# Altium PCB CareLite 1.21.pcbdoc (part 2 of 3)
Units mil, origin at the board's own origin, x right, y up, seen from the top; angles counter-clockwise.
Board outline 3463.4 x 4229.5 mil, 2 copper layers (Top Layer, Bottom Layer); 41 components, 60 nets, 161 pads, 146 vias.
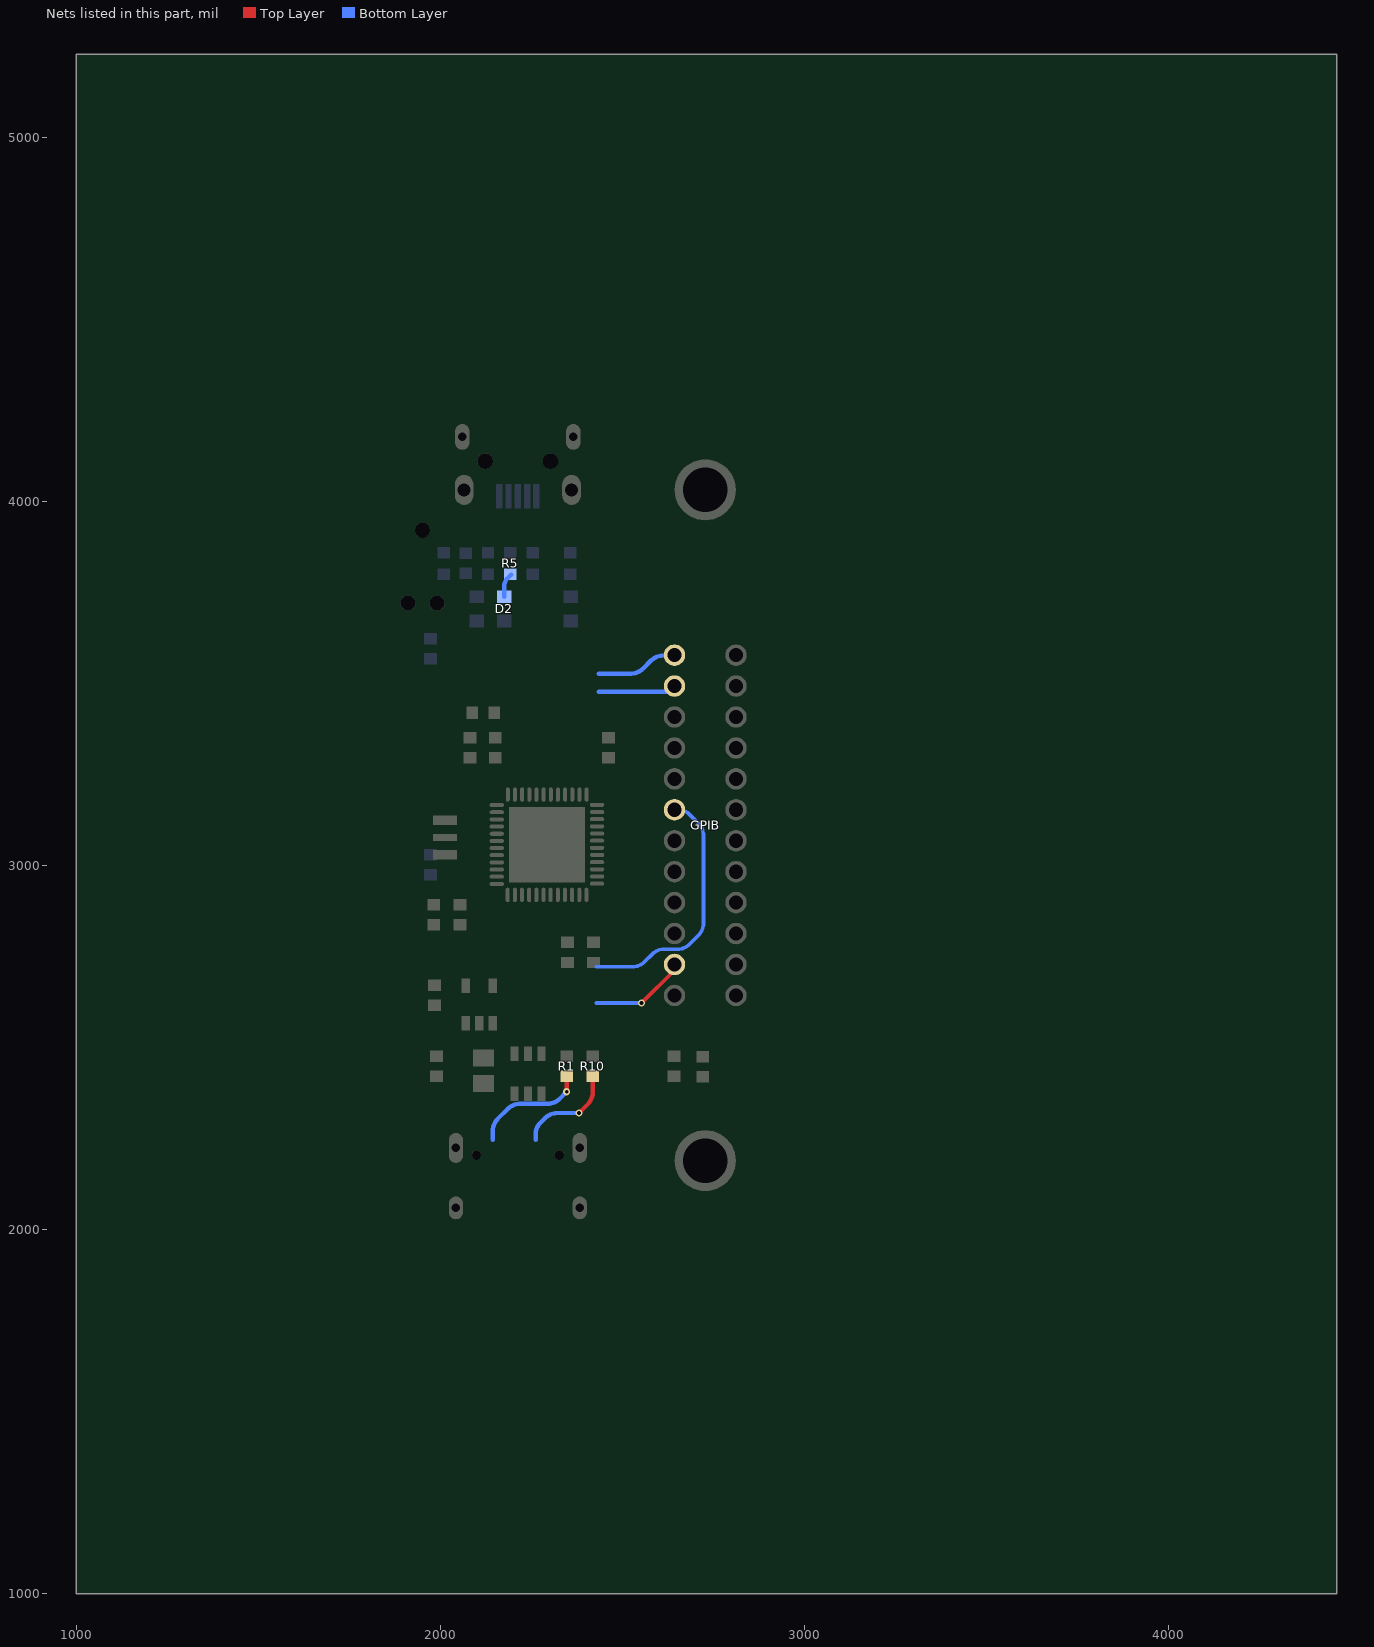
[diagram p2: the nets of this part, all layers, seen from the top]

## Footprints (in the part's own frame and the unit in brackets; to place one, negate y for a bottom-side part, rotate by r counter-clockwise, add the part's x,y. Pads: shape width x height; smd on the part's side, far side on the other; paste and mask are expansions set on the pad) (continued)
SOIC127P1030-24AM [mil]
  Top Layer region: 143.7,-288.78 142.72,-288.74 141.74,-288.64 140.77,-288.46 139.82,-288.22 138.89,-287.91 137.98,-287.53 137.1,-287.09 136.25,-286.59 135.44,-286.03 134.68,-285.41 133.96,-284.74 133.29,-284.02 132.67,-283.26 132.11,-282.45 131.61,-281.6 131.17,-280.72 130.79,-279.82 130.48,-278.88 130.24,-277.93 130.06,-276.96 129.96,-275.98 129.92,-275 129.96,-274.02 130.06,-273.04 130.24,-272.07 130.48,-271.12 130.79,-270.18 131.17,-269.28 131.61,-268.4 132.11,-267.55 132.67,-266.74 133.29,-265.98 133.96,-265.26 134.68,-264.59 135.44,-263.97 136.25,-263.41 137.1,-262.91 137.98,-262.47 138.89,-262.09 139.82,-261.78 140.77,-261.53 141.74,-261.36 142.72,-261.26 143.7,-261.22 218.5,-261.22 219.49,-261.26 220.47,-261.36 221.43,-261.53 222.39,-261.78 223.32,-262.09 224.23,-262.47 225.11,-262.91 225.95,-263.41 226.76,-263.97 227.53,-264.59 228.25,-265.26 228.92,-265.98 229.53,-266.74 230.1,-267.55 230.6,-268.4 231.04,-269.28 231.41,-270.18 231.72,-271.12 231.97,-272.07 232.14,-273.04 232.25,-274.02 232.28,-275 232.25,-275.98 232.14,-276.96 231.97,-277.93 231.72,-278.88 231.41,-279.82 231.04,-280.72 230.6,-281.6 230.1,-282.45 229.53,-283.26 228.92,-284.02 228.25,-284.74 227.53,-285.41 226.76,-286.03 225.95,-286.59 225.11,-287.09 224.23,-287.53 223.32,-287.91 222.39,-288.22 221.43,-288.46 220.47,-288.64 219.49,-288.74 218.5,-288.78
  Top Layer region: 143.7,-238.78 142.72,-238.74 141.74,-238.64 140.77,-238.46 139.82,-238.22 138.89,-237.91 137.98,-237.53 137.1,-237.09 136.25,-236.59 135.44,-236.03 134.68,-235.41 133.96,-234.74 133.29,-234.02 132.67,-233.26 132.11,-232.45 131.61,-231.6 131.17,-230.72 130.79,-229.82 130.48,-228.88 130.24,-227.93 130.06,-226.96 129.96,-225.98 129.92,-225 129.96,-224.02 130.06,-223.04 130.24,-222.07 130.48,-221.12 130.79,-220.18 131.17,-219.28 131.61,-218.4 132.11,-217.55 132.67,-216.74 133.29,-215.98 133.96,-215.26 134.68,-214.59 135.44,-213.97 136.25,-213.41 137.1,-212.91 137.98,-212.47 138.89,-212.09 139.82,-211.78 140.77,-211.53 141.74,-211.36 142.72,-211.26 143.7,-211.22 218.5,-211.22 219.49,-211.26 220.47,-211.36 221.43,-211.53 222.39,-211.78 223.32,-212.09 224.23,-212.47 225.11,-212.91 225.95,-213.41 226.76,-213.97 227.53,-214.59 228.25,-215.26 228.92,-215.98 229.53,-216.74 230.1,-217.55 230.6,-218.4 231.04,-219.28 231.41,-220.18 231.72,-221.12 231.97,-222.07 232.14,-223.04 232.25,-224.02 232.28,-225 232.25,-225.98 232.14,-226.96 231.97,-227.93 231.72,-228.88 231.41,-229.82 231.04,-230.72 230.6,-231.6 230.1,-232.45 229.53,-233.26 228.92,-234.02 228.25,-234.74 227.53,-235.41 226.76,-236.03 225.95,-236.59 225.11,-237.09 224.23,-237.53 223.32,-237.91 222.39,-238.22 221.43,-238.46 220.47,-238.64 219.49,-238.74 218.5,-238.78
  Top Layer region: 143.7,-188.78 142.72,-188.74 141.74,-188.64 140.77,-188.46 139.82,-188.22 138.89,-187.91 137.98,-187.53 137.1,-187.09 136.25,-186.59 135.44,-186.03 134.68,-185.41 133.96,-184.74 133.29,-184.02 132.67,-183.26 132.11,-182.45 131.61,-181.6 131.17,-180.72 130.79,-179.82 130.48,-178.88 130.24,-177.93 130.06,-176.96 129.96,-175.98 129.92,-175 129.96,-174.02 130.06,-173.04 130.24,-172.07 130.48,-171.12 130.79,-170.18 131.17,-169.28 131.61,-168.4 132.11,-167.55 132.67,-166.74 133.29,-165.98 133.96,-165.26 134.68,-164.59 135.44,-163.97 136.25,-163.41 137.1,-162.91 137.98,-162.47 138.89,-162.09 139.82,-161.78 140.77,-161.53 141.74,-161.36 142.72,-161.26 143.7,-161.22 218.5,-161.22 219.49,-161.26 220.47,-161.36 221.43,-161.53 222.39,-161.78 223.32,-162.09 224.23,-162.47 225.11,-162.91 225.95,-163.41 226.76,-163.97 227.53,-164.59 228.25,-165.26 228.92,-165.98 229.53,-166.74 230.1,-167.55 230.6,-168.4 231.04,-169.28 231.41,-170.18 231.72,-171.12 231.97,-172.07 232.14,-173.04 232.25,-174.02 232.28,-175 232.25,-175.98 232.14,-176.96 231.97,-177.93 231.72,-178.88 231.41,-179.82 231.04,-180.72 230.6,-181.6 230.1,-182.45 229.53,-183.26 228.92,-184.02 228.25,-184.74 227.53,-185.41 226.76,-186.03 225.95,-186.59 225.11,-187.09 224.23,-187.53 223.32,-187.91 222.39,-188.22 221.43,-188.46 220.47,-188.64 219.49,-188.74 218.5,-188.78
  Top Layer region: 143.7,-138.78 142.72,-138.74 141.74,-138.64 140.77,-138.46 139.82,-138.22 138.89,-137.91 137.98,-137.53 137.1,-137.09 136.25,-136.59 135.44,-136.03 134.68,-135.41 133.96,-134.74 133.29,-134.02 132.67,-133.26 132.11,-132.45 131.61,-131.6 131.17,-130.72 130.79,-129.82 130.48,-128.88 130.24,-127.93 130.06,-126.96 129.96,-125.98 129.92,-125 129.96,-124.02 130.06,-123.04 130.24,-122.07 130.48,-121.12 130.79,-120.18 131.17,-119.28 131.61,-118.4 132.11,-117.55 132.67,-116.74 133.29,-115.98 133.96,-115.26 134.68,-114.59 135.44,-113.97 136.25,-113.41 137.1,-112.91 137.98,-112.47 138.89,-112.09 139.82,-111.78 140.77,-111.53 141.74,-111.36 142.72,-111.26 143.7,-111.22 218.5,-111.22 219.49,-111.26 220.47,-111.36 221.43,-111.53 222.39,-111.78 223.32,-112.09 224.23,-112.47 225.11,-112.91 225.95,-113.41 226.76,-113.97 227.53,-114.59 228.25,-115.26 228.92,-115.98 229.53,-116.74 230.1,-117.55 230.6,-118.4 231.04,-119.28 231.41,-120.18 231.72,-121.12 231.97,-122.07 232.14,-123.04 232.25,-124.02 232.28,-125 232.25,-125.98 232.14,-126.96 231.97,-127.93 231.72,-128.88 231.41,-129.82 231.04,-130.72 230.6,-131.6 230.1,-132.45 229.53,-133.26 228.92,-134.02 228.25,-134.74 227.53,-135.41 226.76,-136.03 225.95,-136.59 225.11,-137.09 224.23,-137.53 223.32,-137.91 222.39,-138.22 221.43,-138.46 220.47,-138.64 219.49,-138.74 218.5,-138.78
  Top Layer region: 143.7,-88.78 142.72,-88.74 141.74,-88.64 140.77,-88.46 139.82,-88.22 138.89,-87.91 137.98,-87.53 137.1,-87.09 136.25,-86.59 135.44,-86.03 134.68,-85.41 133.96,-84.74 133.29,-84.02 132.67,-83.26 132.11,-82.45 131.61,-81.6 131.17,-80.72 130.79,-79.82 130.48,-78.88 130.24,-77.93 130.06,-76.96 129.96,-75.98 129.92,-75 129.96,-74.02 130.06,-73.04 130.24,-72.07 130.48,-71.12 130.79,-70.18 131.17,-69.28 131.61,-68.4 132.11,-67.55 132.67,-66.74 133.29,-65.98 133.96,-65.26 134.68,-64.59 135.44,-63.97 136.25,-63.41 137.1,-62.91 137.98,-62.47 138.89,-62.09 139.82,-61.78 140.77,-61.53 141.74,-61.36 142.72,-61.26 143.7,-61.22 218.5,-61.22 219.49,-61.26 220.47,-61.36 221.43,-61.53 222.39,-61.78 223.32,-62.09 224.23,-62.47 225.11,-62.91 225.95,-63.41 226.76,-63.97 227.53,-64.59 228.25,-65.26 228.92,-65.98 229.53,-66.74 230.1,-67.55 230.6,-68.4 231.04,-69.28 231.41,-70.18 231.72,-71.12 231.97,-72.07 232.14,-73.04 232.25,-74.02 232.28,-75 232.25,-75.98 232.14,-76.96 231.97,-77.93 231.72,-78.88 231.41,-79.82 231.04,-80.72 230.6,-81.6 230.1,-82.45 229.53,-83.26 228.92,-84.02 228.25,-84.74 227.53,-85.41 226.76,-86.03 225.95,-86.59 225.11,-87.09 224.23,-87.53 223.32,-87.91 222.39,-88.22 221.43,-88.46 220.47,-88.64 219.49,-88.74 218.5,-88.78
  Top Layer region: 143.7,-38.78 142.72,-38.74 141.74,-38.64 140.77,-38.46 139.82,-38.22 138.89,-37.91 137.98,-37.53 137.1,-37.09 136.25,-36.59 135.44,-36.03 134.68,-35.41 133.96,-34.74 133.29,-34.02 132.67,-33.26 132.11,-32.45 131.61,-31.6 131.17,-30.72 130.79,-29.82 130.48,-28.88 130.24,-27.93 130.06,-26.96 129.96,-25.98 129.92,-25 129.96,-24.02 130.06,-23.04 130.24,-22.07 130.48,-21.12 130.79,-20.18 131.17,-19.28 131.61,-18.4 132.11,-17.55 132.67,-16.74 133.29,-15.98 133.96,-15.26 134.68,-14.59 135.44,-13.97 136.25,-13.41 137.1,-12.91 137.98,-12.47 138.89,-12.09 139.82,-11.78 140.77,-11.53 141.74,-11.36 142.72,-11.26 143.7,-11.22 218.5,-11.22 219.49,-11.26 220.47,-11.36 221.43,-11.53 222.39,-11.78 223.32,-12.09 224.23,-12.47 225.11,-12.91 225.95,-13.41 226.76,-13.97 227.53,-14.59 228.25,-15.26 228.92,-15.98 229.53,-16.74 230.1,-17.55 230.6,-18.4 231.04,-19.28 231.41,-20.18 231.72,-21.12 231.97,-22.07 232.14,-23.04 232.25,-24.02 232.28,-25 232.25,-25.98 232.14,-26.96 231.97,-27.93 231.72,-28.88 231.41,-29.82 231.04,-30.72 230.6,-31.6 230.1,-32.45 229.53,-33.26 228.92,-34.02 228.25,-34.74 227.53,-35.41 226.76,-36.03 225.95,-36.59 225.11,-37.09 224.23,-37.53 223.32,-37.91 222.39,-38.22 221.43,-38.46 220.47,-38.64 219.49,-38.74 218.5,-38.78
  Top Layer region: 143.7,11.22 142.72,11.26 141.74,11.36 140.77,11.54 139.82,11.78 138.89,12.09 137.98,12.47 137.1,12.91 136.25,13.41 135.44,13.97 134.68,14.59 133.96,15.26 133.29,15.98 132.67,16.74 132.11,17.55 131.61,18.4 131.17,19.28 130.79,20.18 130.48,21.12 130.24,22.07 130.06,23.04 129.96,24.02 129.92,25 129.96,25.98 130.06,26.96 130.24,27.93 130.48,28.88 130.79,29.82 131.17,30.72 131.61,31.6 132.11,32.45 132.67,33.26 133.29,34.02 133.96,34.74 134.68,35.41 135.44,36.03 136.25,36.59 137.1,37.09 137.98,37.53 138.89,37.91 139.82,38.22 140.77,38.47 141.74,38.64 142.72,38.74 143.7,38.78 218.5,38.78 219.49,38.74 220.47,38.64 221.43,38.47 222.39,38.22 223.32,37.91 224.23,37.53 225.11,37.09 225.95,36.59 226.76,36.03 227.53,35.41 228.25,34.74 228.92,34.02 229.53,33.26 230.1,32.45 230.6,31.6 231.04,30.72 231.41,29.82 231.72,28.88 231.97,27.93 232.14,26.96 232.25,25.98 232.28,25 232.25,24.02 232.14,23.04 231.97,22.07 231.72,21.12 231.41,20.18 231.04,19.28 230.6,18.4 230.1,17.55 229.53,16.74 228.92,15.98 228.25,15.26 227.53,14.59 226.76,13.97 225.95,13.41 225.11,12.91 224.23,12.47 223.32,12.09 222.39,11.78 221.43,11.54 220.47,11.36 219.49,11.26 218.5,11.22
  Top Layer region: 143.7,61.22 142.72,61.26 141.74,61.36 140.77,61.54 139.82,61.78 138.89,62.09 137.98,62.47 137.1,62.91 136.25,63.41 135.44,63.97 134.68,64.59 133.96,65.26 133.29,65.98 132.67,66.74 132.11,67.55 131.61,68.4 131.17,69.28 130.79,70.18 130.48,71.12 130.24,72.07 130.06,73.04 129.96,74.02 129.92,75 129.96,75.98 130.06,76.96 130.24,77.93 130.48,78.88 130.79,79.82 131.17,80.72 131.61,81.6 132.11,82.45 132.67,83.26 133.29,84.02 133.96,84.74 134.68,85.41 135.44,86.03 136.25,86.59 137.1,87.09 137.98,87.53 138.89,87.91 139.82,88.22 140.77,88.47 141.74,88.64 142.72,88.74 143.7,88.78 218.5,88.78 219.49,88.74 220.47,88.64 221.43,88.47 222.39,88.22 223.32,87.91 224.23,87.53 225.11,87.09 225.95,86.59 226.76,86.03 227.53,85.41 228.25,84.74 228.92,84.02 229.53,83.26 230.1,82.45 230.6,81.6 231.04,80.72 231.41,79.82 231.72,78.88 231.97,77.93 232.14,76.96 232.25,75.98 232.28,75 232.25,74.02 232.14,73.04 231.97,72.07 231.72,71.12 231.41,70.18 231.04,69.28 230.6,68.4 230.1,67.55 229.53,66.74 228.92,65.98 228.25,65.26 227.53,64.59 226.76,63.97 225.95,63.41 225.11,62.91 224.23,62.47 223.32,62.09 222.39,61.78 221.43,61.54 220.47,61.36 219.49,61.26 218.5,61.22
  Top Layer region: 143.7,111.22 142.72,111.26 141.74,111.36 140.77,111.54 139.82,111.78 138.89,112.09 137.98,112.47 137.1,112.91 136.25,113.41 135.44,113.97 134.68,114.59 133.96,115.26 133.29,115.98 132.67,116.74 132.11,117.55 131.61,118.4 131.17,119.28 130.79,120.18 130.48,121.12 130.24,122.07 130.06,123.04 129.96,124.02 129.92,125 129.96,125.98 130.06,126.96 130.24,127.93 130.48,128.88 130.79,129.82 131.17,130.72 131.61,131.6 132.11,132.45 132.67,133.26 133.29,134.02 133.96,134.74 134.68,135.41 135.44,136.03 136.25,136.59 137.1,137.09 137.98,137.53 138.89,137.91 139.82,138.22 140.77,138.47 141.74,138.64 142.72,138.74 143.7,138.78 218.5,138.78 219.49,138.74 220.47,138.64 221.43,138.47 222.39,138.22 223.32,137.91 224.23,137.53 225.11,137.09 225.95,136.59 226.76,136.03 227.53,135.41 228.25,134.74 228.92,134.02 229.53,133.26 230.1,132.45 230.6,131.6 231.04,130.72 231.41,129.82 231.72,128.88 231.97,127.93 232.14,126.96 232.25,125.98 232.28,125 232.25,124.02 232.14,123.04 231.97,122.07 231.72,121.12 231.41,120.18 231.04,119.28 230.6,118.4 230.1,117.55 229.53,116.74 228.92,115.98 228.25,115.26 227.53,114.59 226.76,113.97 225.95,113.41 225.11,112.91 224.23,112.47 223.32,112.09 222.39,111.78 221.43,111.54 220.47,111.36 219.49,111.26 218.5,111.22
  Top Layer region: 143.7,161.22 142.72,161.26 141.74,161.36 140.77,161.54 139.82,161.78 138.89,162.09 137.98,162.47 137.1,162.91 136.25,163.41 135.44,163.97 134.68,164.59 133.96,165.26 133.29,165.98 132.67,166.74 132.11,167.55 131.61,168.4 131.17,169.28 130.79,170.18 130.48,171.12 130.24,172.07 130.06,173.04 129.96,174.02 129.92,175 129.96,175.98 130.06,176.96 130.24,177.93 130.48,178.88 130.79,179.82 131.17,180.72 131.61,181.6 132.11,182.45 132.67,183.26 133.29,184.02 133.96,184.74 134.68,185.41 135.44,186.03 136.25,186.59 137.1,187.09 137.98,187.53 138.89,187.91 139.82,188.22 140.77,188.47 141.74,188.64 142.72,188.74 143.7,188.78 218.5,188.78 219.49,188.74 220.47,188.64 221.43,188.47 222.39,188.22 223.32,187.91 224.23,187.53 225.11,187.09 225.95,186.59 226.76,186.03 227.53,185.41 228.25,184.74 228.92,184.02 229.53,183.26 230.1,182.45 230.6,181.6 231.04,180.72 231.41,179.82 231.72,178.88 231.97,177.93 232.14,176.96 232.25,175.98 232.28,175 232.25,174.02 232.14,173.04 231.97,172.07 231.72,171.12 231.41,170.18 231.04,169.28 230.6,168.4 230.1,167.55 229.53,166.74 228.92,165.98 228.25,165.26 227.53,164.59 226.76,163.97 225.95,163.41 225.11,162.91 224.23,162.47 223.32,162.09 222.39,161.78 221.43,161.54 220.47,161.36 219.49,161.26 218.5,161.22
  Top Layer region: 143.7,211.22 142.72,211.26 141.74,211.36 140.77,211.54 139.82,211.78 138.89,212.09 137.98,212.47 137.1,212.91 136.25,213.41 135.44,213.97 134.68,214.59 133.96,215.26 133.29,215.98 132.67,216.74 132.11,217.55 131.61,218.4 131.17,219.28 130.79,220.18 130.48,221.12 130.24,222.07 130.06,223.04 129.96,224.02 129.92,225 129.96,225.98 130.06,226.96 130.24,227.93 130.48,228.88 130.79,229.82 131.17,230.72 131.61,231.6 132.11,232.45 132.67,233.26 133.29,234.02 133.96,234.74 134.68,235.41 135.44,236.03 136.25,236.59 137.1,237.09 137.98,237.53 138.89,237.91 139.82,238.22 140.77,238.47 141.74,238.64 142.72,238.74 143.7,238.78 218.5,238.78 219.49,238.74 220.47,238.64 221.43,238.47 222.39,238.22 223.32,237.91 224.23,237.53 225.11,237.09 225.95,236.59 226.76,236.03 227.53,235.41 228.25,234.74 228.92,234.02 229.53,233.26 230.1,232.45 230.6,231.6 231.04,230.72 231.41,229.82 231.72,228.88 231.97,227.93 232.14,226.96 232.25,225.98 232.28,225 232.25,224.02 232.14,223.04 231.97,222.07 231.72,221.12 231.41,220.18 231.04,219.28 230.6,218.4 230.1,217.55 229.53,216.74 228.92,215.98 228.25,215.26 227.53,214.59 226.76,213.97 225.95,213.41 225.11,212.91 224.23,212.47 223.32,212.09 222.39,211.78 221.43,211.54 220.47,211.36 219.49,211.26 218.5,211.22
  Top Layer region: 143.7,261.22 142.72,261.26 141.74,261.36 140.77,261.54 139.82,261.78 138.89,262.09 137.98,262.47 137.1,262.91 136.25,263.41 135.44,263.97 134.68,264.59 133.96,265.26 133.29,265.98 132.67,266.74 132.11,267.55 131.61,268.4 131.17,269.28 130.79,270.18 130.48,271.12 130.24,272.07 130.06,273.04 129.96,274.02 129.92,275 129.96,275.98 130.06,276.96 130.24,277.93 130.48,278.88 130.79,279.82 131.17,280.72 131.61,281.6 132.11,282.45 132.67,283.26 133.29,284.02 133.96,284.74 134.68,285.41 135.44,286.03 136.25,286.59 137.1,287.09 137.98,287.53 138.89,287.91 139.82,288.22 140.77,288.47 141.74,288.64 142.72,288.74 143.7,288.78 218.5,288.78 219.49,288.74 220.47,288.64 221.43,288.47 222.39,288.22 223.32,287.91 224.23,287.53 225.11,287.09 225.95,286.59 226.76,286.03 227.53,285.41 228.25,284.74 228.92,284.02 229.53,283.26 230.1,282.45 230.6,281.6 231.04,280.72 231.41,279.82 231.72,278.88 231.97,277.93 232.14,276.96 232.25,275.98 232.28,275 232.25,274.02 232.14,273.04 231.97,272.07 231.72,271.12 231.41,270.18 231.04,269.28 230.6,268.4 230.1,267.55 229.53,266.74 228.92,265.98 228.25,265.26 227.53,264.59 226.76,263.97 225.95,263.41 225.11,262.91 224.23,262.47 223.32,262.09 222.39,261.78 221.43,261.54 220.47,261.36 219.49,261.26 218.5,261.22
  Top Layer region: -218.5,-288.78 -219.49,-288.74 -220.46,-288.64 -221.43,-288.46 -222.39,-288.22 -223.32,-287.91 -224.23,-287.53 -225.11,-287.09 -225.95,-286.59 -226.76,-286.03 -227.53,-285.41 -228.25,-284.74 -228.92,-284.02 -229.54,-283.26 -230.1,-282.45 -230.6,-281.6 -231.04,-280.72 -231.41,-279.82 -231.72,-278.88 -231.97,-277.93 -232.14,-276.96 -232.25,-275.98 -232.28,-275 -232.25,-274.02 -232.14,-273.04 -231.97,-272.07 -231.72,-271.12 -231.41,-270.18 -231.04,-269.28 -230.6,-268.4 -230.1,-267.55 -229.54,-266.74 -228.92,-265.98 -228.25,-265.26 -227.53,-264.59 -226.76,-263.97 -225.95,-263.41 -225.11,-262.91 -224.23,-262.47 -223.32,-262.09 -222.39,-261.78 -221.43,-261.53 -220.46,-261.36 -219.49,-261.26 -218.5,-261.22 -143.7,-261.22 -142.72,-261.26 -141.74,-261.36 -140.77,-261.53 -139.82,-261.78 -138.88,-262.09 -137.98,-262.47 -137.1,-262.91 -136.25,-263.41 -135.44,-263.97 -134.68,-264.59 -133.96,-265.26 -133.29,-265.98 -132.67,-266.74 -132.11,-267.55 -131.61,-268.4 -131.17,-269.28 -130.79,-270.18 -130.48,-271.12 -130.24,-272.07 -130.06,-273.04 -129.96,-274.02 -129.92,-275 -129.96,-275.98 -130.06,-276.96 -130.24,-277.93 -130.48,-278.88 -130.79,-279.82 -131.17,-280.72 -131.61,-281.6 -132.11,-282.45 -132.67,-283.26 -133.29,-284.02 -133.96,-284.74 -134.68,-285.41 -135.44,-286.03 -136.25,-286.59 -137.1,-287.09 -137.98,-287.53 -138.88,-287.91 -139.82,-288.22 -140.77,-288.46 -141.74,-288.64 -142.72,-288.74 -143.7,-288.78
  Top Layer region: -218.5,-238.78 -219.49,-238.74 -220.46,-238.64 -221.43,-238.46 -222.39,-238.22 -223.32,-237.91 -224.23,-237.53 -225.11,-237.09 -225.95,-236.59 -226.76,-236.03 -227.53,-235.41 -228.25,-234.74 -228.92,-234.02 -229.54,-233.26 -230.1,-232.45 -230.6,-231.6 -231.04,-230.72 -231.41,-229.82 -231.72,-228.88 -231.97,-227.93 -232.14,-226.96 -232.25,-225.98 -232.28,-225 -232.25,-224.02 -232.14,-223.04 -231.97,-222.07 -231.72,-221.12 -231.41,-220.18 -231.04,-219.28 -230.6,-218.4 -230.1,-217.55 -229.54,-216.74 -228.92,-215.98 -228.25,-215.26 -227.53,-214.59 -226.76,-213.97 -225.95,-213.41 -225.11,-212.91 -224.23,-212.47 -223.32,-212.09 -222.39,-211.78 -221.43,-211.53 -220.46,-211.36 -219.49,-211.26 -218.5,-211.22 -143.7,-211.22 -142.72,-211.26 -141.74,-211.36 -140.77,-211.53 -139.82,-211.78 -138.88,-212.09 -137.98,-212.47 -137.1,-212.91 -136.25,-213.41 -135.44,-213.97 -134.68,-214.59 -133.96,-215.26 -133.29,-215.98 -132.67,-216.74 -132.11,-217.55 -131.61,-218.4 -131.17,-219.28 -130.79,-220.18 -130.48,-221.12 -130.24,-222.07 -130.06,-223.04 -129.96,-224.02 -129.92,-225 -129.96,-225.98 -130.06,-226.96 -130.24,-227.93 -130.48,-228.88 -130.79,-229.82 -131.17,-230.72 -131.61,-231.6 -132.11,-232.45 -132.67,-233.26 -133.29,-234.02 -133.96,-234.74 -134.68,-235.41 -135.44,-236.03 -136.25,-236.59 -137.1,-237.09 -137.98,-237.53 -138.88,-237.91 -139.82,-238.22 -140.77,-238.46 -141.74,-238.64 -142.72,-238.74 -143.7,-238.78
  Top Layer region: -218.5,-188.78 -219.49,-188.74 -220.46,-188.64 -221.43,-188.46 -222.39,-188.22 -223.32,-187.91 -224.23,-187.53 -225.11,-187.09 -225.95,-186.59 -226.76,-186.03 -227.53,-185.41 -228.25,-184.74 -228.92,-184.02 -229.54,-183.26 -230.1,-182.45 -230.6,-181.6 -231.04,-180.72 -231.41,-179.82 -231.72,-178.88 -231.97,-177.93 -232.14,-176.96 -232.25,-175.98 -232.28,-175 -232.25,-174.02 -232.14,-173.04 -231.97,-172.07 -231.72,-171.12 -231.41,-170.18 -231.04,-169.28 -230.6,-168.4 -230.1,-167.55 -229.54,-166.74 -228.92,-165.98 -228.25,-165.26 -227.53,-164.59 -226.76,-163.97 -225.95,-163.41 -225.11,-162.91 -224.23,-162.47 -223.32,-162.09 -222.39,-161.78 -221.43,-161.53 -220.46,-161.36 -219.49,-161.26 -218.5,-161.22 -143.7,-161.22 -142.72,-161.26 -141.74,-161.36 -140.77,-161.53 -139.82,-161.78 -138.88,-162.09 -137.98,-162.47 -137.1,-162.91 -136.25,-163.41 -135.44,-163.97 -134.68,-164.59 -133.96,-165.26 -133.29,-165.98 -132.67,-166.74 -132.11,-167.55 -131.61,-168.4 -131.17,-169.28 -130.79,-170.18 -130.48,-171.12 -130.24,-172.07 -130.06,-173.04 -129.96,-174.02 -129.92,-175 -129.96,-175.98 -130.06,-176.96 -130.24,-177.93 -130.48,-178.88 -130.79,-179.82 -131.17,-180.72 -131.61,-181.6 -132.11,-182.45 -132.67,-183.26 -133.29,-184.02 -133.96,-184.74 -134.68,-185.41 -135.44,-186.03 -136.25,-186.59 -137.1,-187.09 -137.98,-187.53 -138.88,-187.91 -139.82,-188.22 -140.77,-188.46 -141.74,-188.64 -142.72,-188.74 -143.7,-188.78
  Top Layer region: -218.5,-138.78 -219.49,-138.74 -220.46,-138.64 -221.43,-138.46 -222.39,-138.22 -223.32,-137.91 -224.23,-137.53 -225.11,-137.09 -225.95,-136.59 -226.76,-136.03 -227.53,-135.41 -228.25,-134.74 -228.92,-134.02 -229.54,-133.26 -230.1,-132.45 -230.6,-131.6 -231.04,-130.72 -231.41,-129.82 -231.72,-128.88 -231.97,-127.93 -232.14,-126.96 -232.25,-125.98 -232.28,-125 -232.25,-124.02 -232.14,-123.04 -231.97,-122.07 -231.72,-121.12 -231.41,-120.18 -231.04,-119.28 -230.6,-118.4 -230.1,-117.55 -229.54,-116.74 -228.92,-115.98 -228.25,-115.26 -227.53,-114.59 -226.76,-113.97 -225.95,-113.41 -225.11,-112.91 -224.23,-112.47 -223.32,-112.09 -222.39,-111.78 -221.43,-111.53 -220.46,-111.36 -219.49,-111.26 -218.5,-111.22 -143.7,-111.22 -142.72,-111.26 -141.74,-111.36 -140.77,-111.53 -139.82,-111.78 -138.88,-112.09 -137.98,-112.47 -137.1,-112.91 -136.25,-113.41 -135.44,-113.97 -134.68,-114.59 -133.96,-115.26 -133.29,-115.98 -132.67,-116.74 -132.11,-117.55 -131.61,-118.4 -131.17,-119.28 -130.79,-120.18 -130.48,-121.12 -130.24,-122.07 -130.06,-123.04 -129.96,-124.02 -129.92,-125 -129.96,-125.98 -130.06,-126.96 -130.24,-127.93 -130.48,-128.88 -130.79,-129.82 -131.17,-130.72 -131.61,-131.6 -132.11,-132.45 -132.67,-133.26 -133.29,-134.02 -133.96,-134.74 -134.68,-135.41 -135.44,-136.03 -136.25,-136.59 -137.1,-137.09 -137.98,-137.53 -138.88,-137.91 -139.82,-138.22 -140.77,-138.46 -141.74,-138.64 -142.72,-138.74 -143.7,-138.78
  Top Layer region: -218.5,-88.78 -219.49,-88.74 -220.46,-88.64 -221.43,-88.46 -222.39,-88.22 -223.32,-87.91 -224.23,-87.53 -225.11,-87.09 -225.95,-86.59 -226.76,-86.03 -227.53,-85.41 -228.25,-84.74 -228.92,-84.02 -229.54,-83.26 -230.1,-82.45 -230.6,-81.6 -231.04,-80.72 -231.41,-79.82 -231.72,-78.88 -231.97,-77.93 -232.14,-76.96 -232.25,-75.98 -232.28,-75 -232.25,-74.02 -232.14,-73.04 -231.97,-72.07 -231.72,-71.12 -231.41,-70.18 -231.04,-69.28 -230.6,-68.4 -230.1,-67.55 -229.54,-66.74 -228.92,-65.98 -228.25,-65.26 -227.53,-64.59 -226.76,-63.97 -225.95,-63.41 -225.11,-62.91 -224.23,-62.47 -223.32,-62.09 -222.39,-61.78 -221.43,-61.53 -220.46,-61.36 -219.49,-61.26 -218.5,-61.22 -143.7,-61.22 -142.72,-61.26 -141.74,-61.36 -140.77,-61.53 -139.82,-61.78 -138.88,-62.09 -137.98,-62.47 -137.1,-62.91 -136.25,-63.41 -135.44,-63.97 -134.68,-64.59 -133.96,-65.26 -133.29,-65.98 -132.67,-66.74 -132.11,-67.55 -131.61,-68.4 -131.17,-69.28 -130.79,-70.18 -130.48,-71.12 -130.24,-72.07 -130.06,-73.04 -129.96,-74.02 -129.92,-75 -129.96,-75.98 -130.06,-76.96 -130.24,-77.93 -130.48,-78.88 -130.79,-79.82 -131.17,-80.72 -131.61,-81.6 -132.11,-82.45 -132.67,-83.26 -133.29,-84.02 -133.96,-84.74 -134.68,-85.41 -135.44,-86.03 -136.25,-86.59 -137.1,-87.09 -137.98,-87.53 -138.88,-87.91 -139.82,-88.22 -140.77,-88.46 -141.74,-88.64 -142.72,-88.74 -143.7,-88.78
  Top Layer region: -218.5,-38.78 -219.49,-38.74 -220.46,-38.64 -221.43,-38.46 -222.39,-38.22 -223.32,-37.91 -224.23,-37.53 -225.11,-37.09 -225.95,-36.59 -226.76,-36.03 -227.53,-35.41 -228.25,-34.74 -228.92,-34.02 -229.54,-33.26 -230.1,-32.45 -230.6,-31.6 -231.04,-30.72 -231.41,-29.82 -231.72,-28.88 -231.97,-27.93 -232.14,-26.96 -232.25,-25.98 -232.28,-25 -232.25,-24.02 -232.14,-23.04 -231.97,-22.07 -231.72,-21.12 -231.41,-20.18 -231.04,-19.28 -230.6,-18.4 -230.1,-17.55 -229.54,-16.74 -228.92,-15.98 -228.25,-15.26 -227.53,-14.59 -226.76,-13.97 -225.95,-13.41 -225.11,-12.91 -224.23,-12.47 -223.32,-12.09 -222.39,-11.78 -221.43,-11.53 -220.46,-11.36 -219.49,-11.26 -218.5,-11.22 -143.7,-11.22 -142.72,-11.26 -141.74,-11.36 -140.77,-11.53 -139.82,-11.78 -138.88,-12.09 -137.98,-12.47 -137.1,-12.91 -136.25,-13.41 -135.44,-13.97 -134.68,-14.59 -133.96,-15.26 -133.29,-15.98 -132.67,-16.74 -132.11,-17.55 -131.61,-18.4 -131.17,-19.28 -130.79,-20.18 -130.48,-21.12 -130.24,-22.07 -130.06,-23.04 -129.96,-24.02 -129.92,-25 -129.96,-25.98 -130.06,-26.96 -130.24,-27.93 -130.48,-28.88 -130.79,-29.82 -131.17,-30.72 -131.61,-31.6 -132.11,-32.45 -132.67,-33.26 -133.29,-34.02 -133.96,-34.74 -134.68,-35.41 -135.44,-36.03 -136.25,-36.59 -137.1,-37.09 -137.98,-37.53 -138.88,-37.91 -139.82,-38.22 -140.77,-38.46 -141.74,-38.64 -142.72,-38.74 -143.7,-38.78
  Top Layer region: -218.5,11.22 -219.49,11.26 -220.46,11.36 -221.43,11.54 -222.39,11.78 -223.32,12.09 -224.23,12.47 -225.11,12.91 -225.95,13.41 -226.76,13.97 -227.53,14.59 -228.25,15.26 -228.92,15.98 -229.54,16.74 -230.1,17.55 -230.6,18.4 -231.04,19.28 -231.41,20.18 -231.72,21.12 -231.97,22.07 -232.14,23.04 -232.25,24.02 -232.28,25 -232.25,25.98 -232.14,26.96 -231.97,27.93 -231.72,28.88 -231.41,29.82 -231.04,30.72 -230.6,31.6 -230.1,32.45 -229.54,33.26 -228.92,34.02 -228.25,34.74 -227.53,35.41 -226.76,36.03 -225.95,36.59 -225.11,37.09 -224.23,37.53 -223.32,37.91 -222.39,38.22 -221.43,38.47 -220.46,38.64 -219.49,38.74 -218.5,38.78 -143.7,38.78 -142.72,38.74 -141.74,38.64 -140.77,38.47 -139.82,38.22 -138.88,37.91 -137.98,37.53 -137.1,37.09 -136.25,36.59 -135.44,36.03 -134.68,35.41 -133.96,34.74 -133.29,34.02 -132.67,33.26 -132.11,32.45 -131.61,31.6 -131.17,30.72 -130.79,29.82 -130.48,28.88 -130.24,27.93 -130.06,26.96 -129.96,25.98 -129.92,25 -129.96,24.02 -130.06,23.04 -130.24,22.07 -130.48,21.12 -130.79,20.18 -131.17,19.28 -131.61,18.4 -132.11,17.55 -132.67,16.74 -133.29,15.98 -133.96,15.26 -134.68,14.59 -135.44,13.97 -136.25,13.41 -137.1,12.91 -137.98,12.47 -138.88,12.09 -139.82,11.78 -140.77,11.54 -141.74,11.36 -142.72,11.26 -143.7,11.22
  Top Layer region: -218.5,61.22 -219.49,61.26 -220.46,61.36 -221.43,61.54 -222.39,61.78 -223.32,62.09 -224.23,62.47 -225.11,62.91 -225.95,63.41 -226.76,63.97 -227.53,64.59 -228.25,65.26 -228.92,65.98 -229.54,66.74 -230.1,67.55 -230.6,68.4 -231.04,69.28 -231.41,70.18 -231.72,71.12 -231.97,72.07 -232.14,73.04 -232.25,74.02 -232.28,75 -232.25,75.98 -232.14,76.96 -231.97,77.93 -231.72,78.88 -231.41,79.82 -231.04,80.72 -230.6,81.6 -230.1,82.45 -229.54,83.26 -228.92,84.02 -228.25,84.74 -227.53,85.41 -226.76,86.03 -225.95,86.59 -225.11,87.09 -224.23,87.53 -223.32,87.91 -222.39,88.22 -221.43,88.47 -220.46,88.64 -219.49,88.74 -218.5,88.78 -143.7,88.78 -142.72,88.74 -141.74,88.64 -140.77,88.47 -139.82,88.22 -138.88,87.91 -137.98,87.53 -137.1,87.09 -136.25,86.59 -135.44,86.03 -134.68,85.41 -133.96,84.74 -133.29,84.02 -132.67,83.26 -132.11,82.45 -131.61,81.6 -131.17,80.72 -130.79,79.82 -130.48,78.88 -130.24,77.93 -130.06,76.96 -129.96,75.98 -129.92,75 -129.96,74.02 -130.06,73.04 -130.24,72.07 -130.48,71.12 -130.79,70.18 -131.17,69.28 -131.61,68.4 -132.11,67.55 -132.67,66.74 -133.29,65.98 -133.96,65.26 -134.68,64.59 -135.44,63.97 -136.25,63.41 -137.1,62.91 -137.98,62.47 -138.88,62.09 -139.82,61.78 -140.77,61.54 -141.74,61.36 -142.72,61.26 -143.7,61.22
  Top Layer region: -218.5,111.22 -219.49,111.26 -220.46,111.36 -221.43,111.54 -222.39,111.78 -223.32,112.09 -224.23,112.47 -225.11,112.91 -225.95,113.41 -226.76,113.97 -227.53,114.59 -228.25,115.26 -228.92,115.98 -229.54,116.74 -230.1,117.55 -230.6,118.4 -231.04,119.28 -231.41,120.18 -231.72,121.12 -231.97,122.07 -232.14,123.04 -232.25,124.02 -232.28,125 -232.25,125.98 -232.14,126.96 -231.97,127.93 -231.72,128.88 -231.41,129.82 -231.04,130.72 -230.6,131.6 -230.1,132.45 -229.54,133.26 -228.92,134.02 -228.25,134.74 -227.53,135.41 -226.76,136.03 -225.95,136.59 -225.11,137.09 -224.23,137.53 -223.32,137.91 -222.39,138.22 -221.43,138.47 -220.46,138.64 -219.49,138.74 -218.5,138.78 -143.7,138.78 -142.72,138.74 -141.74,138.64 -140.77,138.47 -139.82,138.22 -138.88,137.91 -137.98,137.53 -137.1,137.09 -136.25,136.59 -135.44,136.03 -134.68,135.41 -133.96,134.74 -133.29,134.02 -132.67,133.26 -132.11,132.45 -131.61,131.6 -131.17,130.72 -130.79,129.82 -130.48,128.88 -130.24,127.93 -130.06,126.96 -129.96,125.98 -129.92,125 -129.96,124.02 -130.06,123.04 -130.24,122.07 -130.48,121.12 -130.79,120.18 -131.17,119.28 -131.61,118.4 -132.11,117.55 -132.67,116.74 -133.29,115.98 -133.96,115.26 -134.68,114.59 -135.44,113.97 -136.25,113.41 -137.1,112.91 -137.98,112.47 -138.88,112.09 -139.82,111.78 -140.77,111.54 -141.74,111.36 -142.72,111.26 -143.7,111.22
  Top Layer region: -218.5,161.22 -219.49,161.26 -220.46,161.36 -221.43,161.54 -222.39,161.78 -223.32,162.09 -224.23,162.47 -225.11,162.91 -225.95,163.41 -226.76,163.97 -227.53,164.59 -228.25,165.26 -228.92,165.98 -229.54,166.74 -230.1,167.55 -230.6,168.4 -231.04,169.28 -231.41,170.18 -231.72,171.12 -231.97,172.07 -232.14,173.04 -232.25,174.02 -232.28,175 -232.25,175.98 -232.14,176.96 -231.97,177.93 -231.72,178.88 -231.41,179.82 -231.04,180.72 -230.6,181.6 -230.1,182.45 -229.54,183.26 -228.92,184.02 -228.25,184.74 -227.53,185.41 -226.76,186.03 -225.95,186.59 -225.11,187.09 -224.23,187.53 -223.32,187.91 -222.39,188.22 -221.43,188.47 -220.46,188.64 -219.49,188.74 -218.5,188.78 -143.7,188.78 -142.72,188.74 -141.74,188.64 -140.77,188.47 -139.82,188.22 -138.88,187.91 -137.98,187.53 -137.1,187.09 -136.25,186.59 -135.44,186.03 -134.68,185.41 -133.96,184.74 -133.29,184.02 -132.67,183.26 -132.11,182.45 -131.61,181.6 -131.17,180.72 -130.79,179.82 -130.48,178.88 -130.24,177.93 -130.06,176.96 -129.96,175.98 -129.92,175 -129.96,174.02 -130.06,173.04 -130.24,172.07 -130.48,171.12 -130.79,170.18 -131.17,169.28 -131.61,168.4 -132.11,167.55 -132.67,166.74 -133.29,165.98 -133.96,165.26 -134.68,164.59 -135.44,163.97 -136.25,163.41 -137.1,162.91 -137.98,162.47 -138.88,162.09 -139.82,161.78 -140.77,161.54 -141.74,161.36 -142.72,161.26 -143.7,161.22
  Top Layer region: -218.5,211.22 -219.49,211.26 -220.46,211.36 -221.43,211.54 -222.39,211.78 -223.32,212.09 -224.23,212.47 -225.11,212.91 -225.95,213.41 -226.76,213.97 -227.53,214.59 -228.25,215.26 -228.92,215.98 -229.54,216.74 -230.1,217.55 -230.6,218.4 -231.04,219.28 -231.41,220.18 -231.72,221.12 -231.97,222.07 -232.14,223.04 -232.25,224.02 -232.28,225 -232.25,225.98 -232.14,226.96 -231.97,227.93 -231.72,228.88 -231.41,229.82 -231.04,230.72 -230.6,231.6 -230.1,232.45 -229.54,233.26 -228.92,234.02 -228.25,234.74 -227.53,235.41 -226.76,236.03 -225.95,236.59 -225.11,237.09 -224.23,237.53 -223.32,237.91 -222.39,238.22 -221.43,238.47 -220.46,238.64 -219.49,238.74 -218.5,238.78 -143.7,238.78 -142.72,238.74 -141.74,238.64 -140.77,238.47 -139.82,238.22 -138.88,237.91 -137.98,237.53 -137.1,237.09 -136.25,236.59 -135.44,236.03 -134.68,235.41 -133.96,234.74 -133.29,234.02 -132.67,233.26 -132.11,232.45 -131.61,231.6 -131.17,230.72 -130.79,229.82 -130.48,228.88 -130.24,227.93 -130.06,226.96 -129.96,225.98 -129.92,225 -129.96,224.02 -130.06,223.04 -130.24,222.07 -130.48,221.12 -130.79,220.18 -131.17,219.28 -131.61,218.4 -132.11,217.55 -132.67,216.74 -133.29,215.98 -133.96,215.26 -134.68,214.59 -135.44,213.97 -136.25,213.41 -137.1,212.91 -137.98,212.47 -138.88,212.09 -139.82,211.78 -140.77,211.54 -141.74,211.36 -142.72,211.26 -143.7,211.22
  Top Layer region: -218.5,261.22 -219.49,261.26 -220.46,261.36 -221.43,261.54 -222.39,261.78 -223.32,262.09 -224.23,262.47 -225.11,262.91 -225.95,263.41 -226.76,263.97 -227.53,264.59 -228.25,265.26 -228.92,265.98 -229.54,266.74 -230.1,267.55 -230.6,268.4 -231.04,269.28 -231.41,270.18 -231.72,271.12 -231.97,272.07 -232.14,273.04 -232.25,274.02 -232.28,275 -232.25,275.98 -232.14,276.96 -231.97,277.93 -231.72,278.88 -231.41,279.82 -231.04,280.72 -230.6,281.6 -230.1,282.45 -229.54,283.26 -228.92,284.02 -228.25,284.74 -227.53,285.41 -226.76,286.03 -225.95,286.59 -225.11,287.09 -224.23,287.53 -223.32,287.91 -222.39,288.22 -221.43,288.47 -220.46,288.64 -219.49,288.74 -218.5,288.78 -143.7,288.78 -142.72,288.74 -141.74,288.64 -140.77,288.47 -139.82,288.22 -138.88,287.91 -137.98,287.53 -137.1,287.09 -136.25,286.59 -135.44,286.03 -134.68,285.41 -133.96,284.74 -133.29,284.02 -132.67,283.26 -132.11,282.45 -131.61,281.6 -131.17,280.72 -130.79,279.82 -130.48,278.88 -130.24,277.93 -130.06,276.96 -129.96,275.98 -129.92,275 -129.96,274.02 -130.06,273.04 -130.24,272.07 -130.48,271.12 -130.79,270.18 -131.17,269.28 -131.61,268.4 -132.11,267.55 -132.67,266.74 -133.29,265.98 -133.96,265.26 -134.68,264.59 -135.44,263.97 -136.25,263.41 -137.1,262.91 -137.98,262.47 -138.88,262.09 -139.82,261.78 -140.77,261.54 -141.74,261.36 -142.72,261.26 -143.7,261.22
  silkscreen extent -114,-315 186,313
SOT-23-5_L3.0-W1.7-P0.95-LS2.8-BR [mm]
  rect 1x0.6 smd paste+0 mask+0.051: 1(1.3,-0.95) 2(1.3,0) 3(1.3,0.95) 4(-1.3,0.95) 5(-1.3,-0.95)
  silkscreen extent -0.9,-1.78 1.65,1.55
SOT-23-6_L2.9-W1.6-P0.95-LS2.8-BL [mm]
  rect 0.55x1 smd paste+0 mask+0.102: 1(-0.95,-1.4) 2(0,-1.4) 3(0.95,-1.4) 4(0.95,1.4) 5(0,1.4) 6(-0.95,1.4)
  silkscreen extent -1.78,-1.52 1.55,0.9
USB_C_CUSB31-CFM2AX-01-Y [mm]
  oval 1x1.6 hole 0.6 slot 1.2 at 90 deg paste+0 mask+0.102: A1B12(-4.32,1.21) A1B12(4.32,1.21)
  oval 1x2.1 hole 0.6 slot 1.8 at 90 deg paste+0 mask+0.102: A1B12(-4.32,-2.97) A1B12(4.32,-2.97)
  round 0.65 hole 0.65 unplated paste+0: ""(-2.89,-2.47) ""(2.89,-2.47)
  Top Layer region: 3.487,-4.12 2.913,-4.12 2.913,-2.97 3.487,-2.97
  Top Layer region: 2.688,-4.12 2.113,-4.12 2.113,-2.97 2.688,-2.97
  Top Layer region: 1.887,-4.12 1.612,-4.12 1.612,-2.97 1.887,-2.97
  Top Layer region: 1.388,-4.12 1.113,-4.12 1.113,-2.97 1.388,-2.97
  Top Layer region: 0.887,-4.12 0.612,-4.12 0.612,-2.97 0.887,-2.97
  Top Layer region: 0.388,-4.12 0.113,-4.12 0.113,-2.97 0.388,-2.97
  Top Layer region: -0.113,-4.12 -0.388,-4.12 -0.388,-2.97 -0.113,-2.97
  Top Layer region: -0.612,-4.12 -0.887,-4.12 -0.887,-2.97 -0.612,-2.97
  Top Layer region: -1.113,-4.12 -1.388,-4.12 -1.388,-2.97 -1.113,-2.97
  Top Layer region: -1.612,-4.12 -1.887,-4.12 -1.887,-2.97 -1.612,-2.97
  Top Layer region: -2.113,-4.12 -2.688,-4.12 -2.688,-2.97 -2.113,-2.97
  Top Layer region: -2.913,-4.12 -3.487,-4.12 -3.487,-2.97 -2.913,-2.97
  silkscreen extent -4.47,-1.54 4.47,3.81
? [mil]

## Via types
v1: diameter 20, hole 10, Top Layer to Bottom Layer, tented both sides, 127 vias
v2: diameter 24, hole 12, Top Layer to Bottom Layer, tented both sides, 14 vias
v3: diameter 28, hole 16, Top Layer to Bottom Layer, tented both sides, 4 vias
v4: diameter 24, hole 16, Top Layer to Bottom Layer, tented both sides, 1 vias

## Nets (pads, with @x,y where several pads share a name; then routed paths per layer and width w, separated by ;. In a path a pad name is that pad's centre, name@x,y a point inside that pad or via, vN(x,y) a via of type N, cw(c..) or ccw(c..) an arc to the next point about the centre after c; other vN are vias at no path point)
ATN: GPIB.11 | length 288.3
  Top Layer w10: v1(2553.02,2622.75) 2643.52,2713.25 GPIB.11@2643.52,2726.75 ; GPIB.11@2634.98,2704.71 ccw(c2614.38,2725.32) GPIB.11@2643.52,2725.32
  Bottom Layer w10: 2429.12,2622.75 v1(2553.02,2622.75)
CC1: R10.1 | length 279.1
  Top Layer w12: v1(2381.02,2320.75) 2405.83,2345.56 2409.01,2349.44 2411.8,2353.61 2414.17,2358.04 2416.09,2362.68 2417.55,2367.48 2418.53,2372.41 2419.02,2377.4 R10.1@2419.02,2421.2
  Bottom Layer w12: 2262.22,2247.35 2262.22,2268.14 2263.78,2275.98 2266.84,2283.36 2271.28,2290.01 2288.83,2307.56 2292.71,2310.74 2296.89,2313.53 2301.31,2315.9 2305.95,2317.82 2310.75,2319.28 2315.68,2320.26 2320.67,2320.75 v1(2381.02,2320.75)
CC2: R1.1 | length 318.3
  Top Layer w12: v1@2347.42,2379.15 R1.1@2347.45,2421.2
  Bottom Layer w12: 2144.12,2247.35 2144.12,2272.2 2144.61,2277.19 2145.59,2282.12 2147.05,2286.92 2148.97,2291.56 2151.34,2295.99 2154.12,2300.16 2157.31,2304.04 2185.83,2332.56 2189.71,2335.74 2193.89,2338.53 2198.31,2340.9 2202.95,2342.82 2207.75,2344.28 2212.68,2345.26 2217.67,2345.75 2295.37,2345.75 2300.36,2346.24 2305.29,2347.22 2310.09,2348.68 2314.73,2350.6 2319.16,2352.97 2323.33,2355.76 2327.21,2358.94 v1(2347.02,2378.75)
D2_1: D2.1 R5.2 | length 66.9
  Bottom Layer w12: D2.1@2176.02,3739.21 2176.02,3771.28 2177.23,3777.38 2179.61,3783.13 2183.07,3788.3 R5.2@2194.52,3799.75
DAV: GPIB.6 | length 705.1
  Bottom Layer w10: 2429.12,2722.75 2533.36,2722.75 2542.33,2724.53 2550.78,2728.04 2558.39,2733.12 2585.65,2760.38 2593.26,2765.46 2601.71,2768.97 2610.68,2770.75 2656.36,2770.75 2665.33,2772.53 2673.78,2776.04 2681.39,2781.12 2712.65,2812.38 2717.73,2819.99 2721.24,2828.44 2723.02,2837.41 2723.02,3088.09 2721.24,3097.06 2717.73,3105.51 2712.65,3113.12 2680.7,3145.07 2675.07,3148.84 2668.8,3151.43 2662.16,3152.75 2644.52,3152.75 GPIB.6@2643.52,3151.75
DIO1: GPIB.1 | length 225.3
  Bottom Layer w12: 2435.02,3527.75 2524.37,3527.75 2529.36,3528.24 2534.29,3529.22 2539.09,3530.68 2543.73,3532.6 2548.16,3534.97 2552.33,3537.76 2556.21,3540.94 2579.83,3564.56 2583.71,3567.74 2587.89,3570.53 2592.31,3572.9 2596.95,3574.82 2601.75,3576.28 2606.68,3577.26 2611.67,3577.75 2642.52,3577.75 GPIB.1@2643.52,3576.75
DIO2: GPIB.2 | length 239.9
  Bottom Layer w12: 2435.02,3477.75 2629.52,3477.75 GPIB.2@2643.52,3491.75 ; 2616.04,3477.75 ccw(c2616.03,3510.31) GPIB.2@2639.06,3487.29